# Altium PCB PCB2.PcbDoc
Units mil, origin at the board's own origin, x right, y up, seen from the top; angles counter-clockwise.
Board outline 6000 x 4000 mil, 2 copper layers (Top Layer, Bottom Layer); 28 components, 48 nets, 152 pads, 0 vias.
Unrouted connection lines stored in the file: 2.
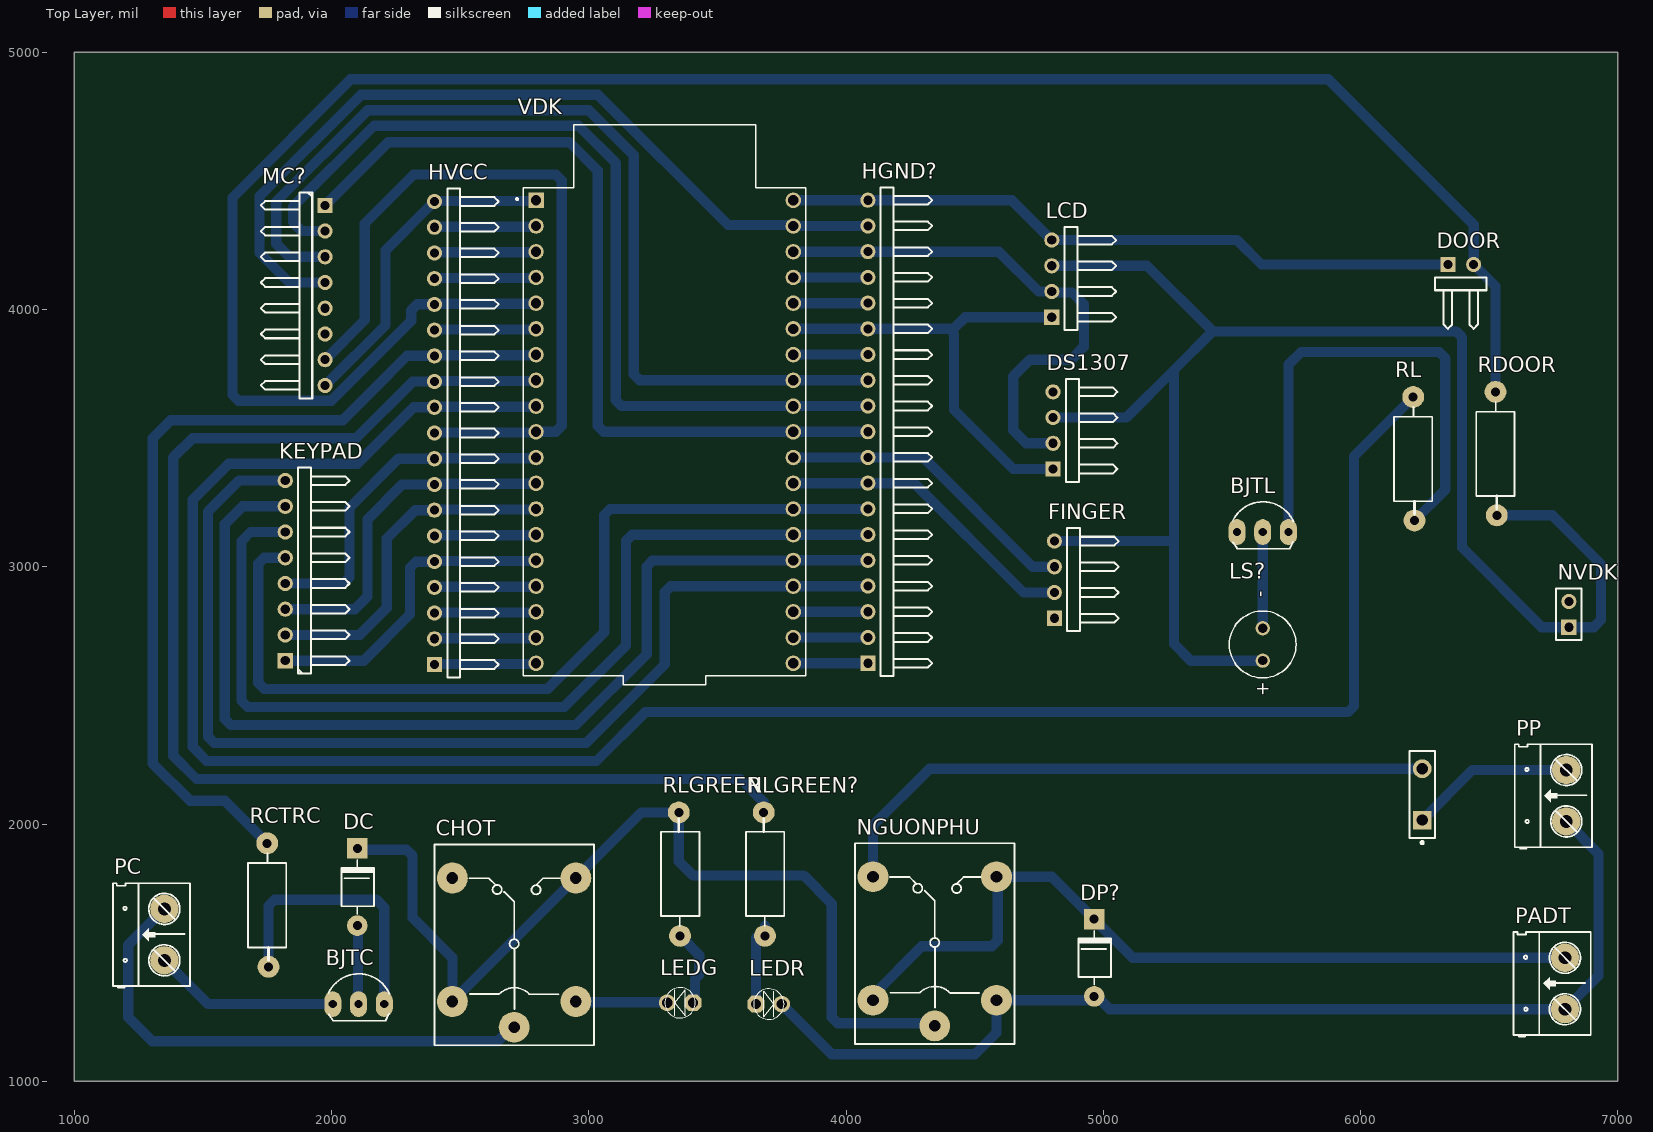
[diagram p0: Top Layer view]
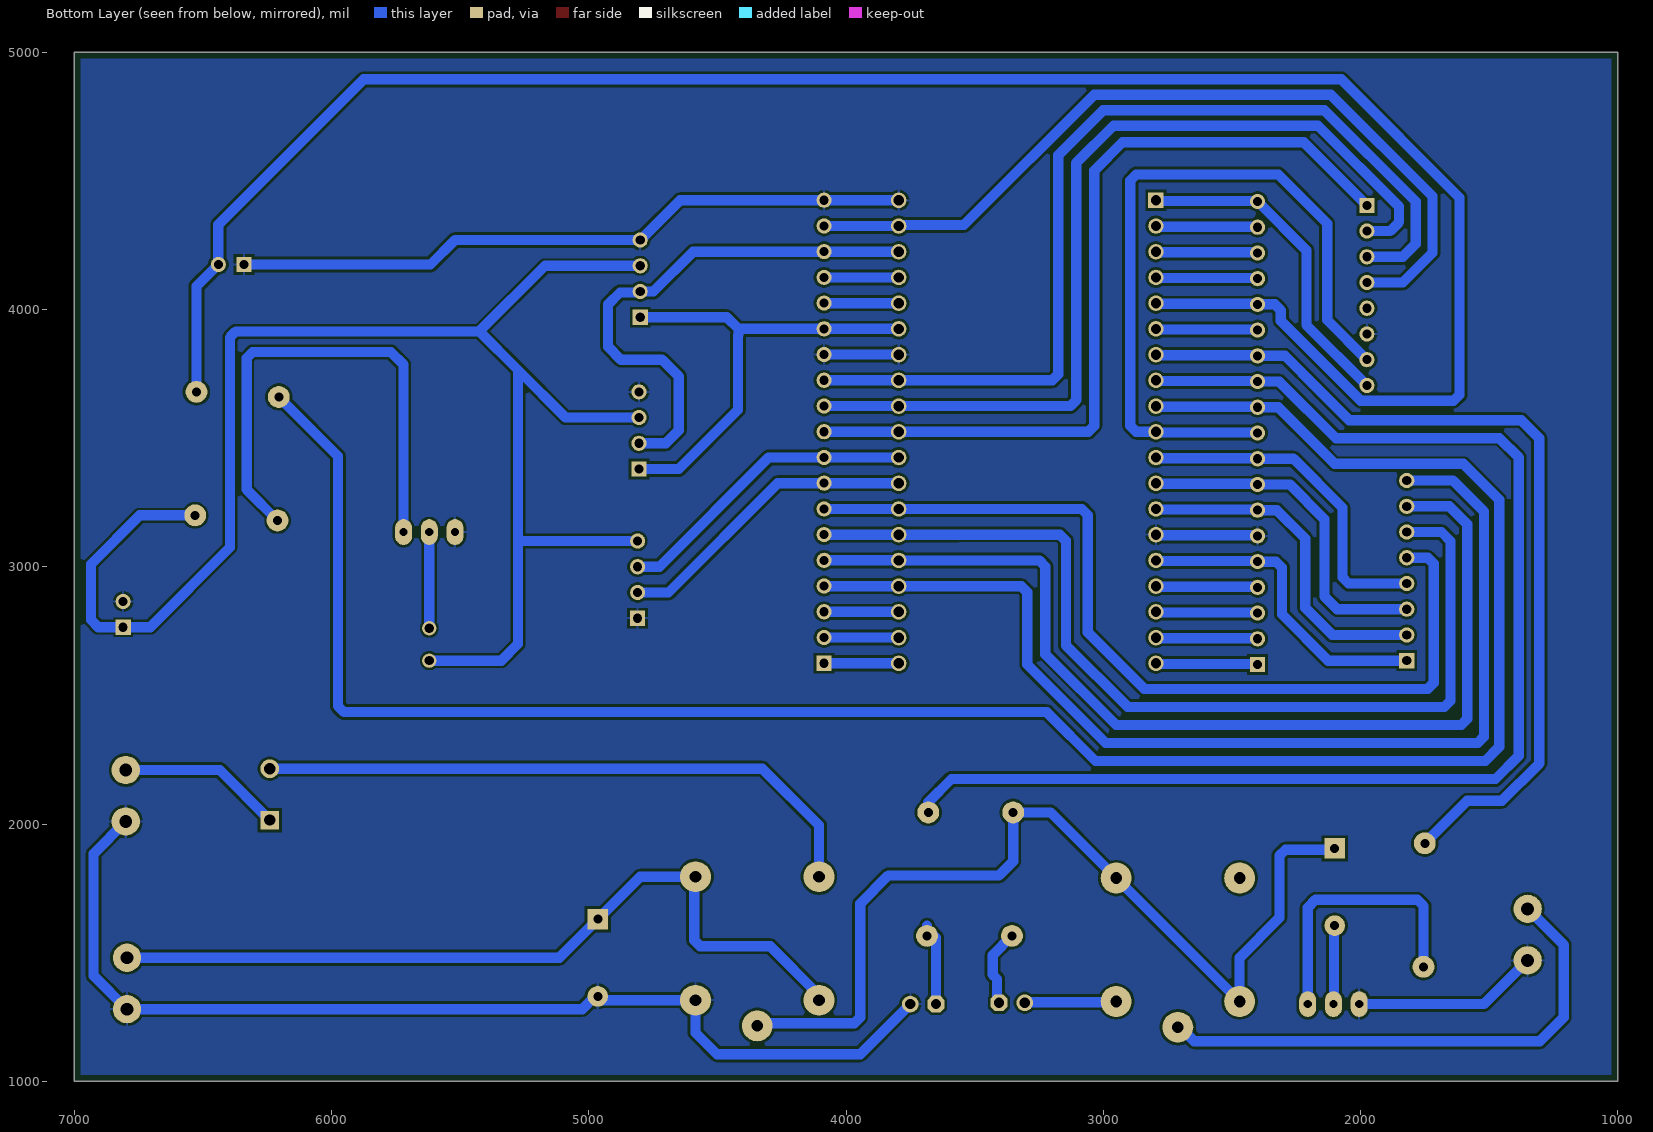
[diagram p1: Bottom Layer view, seen from below]
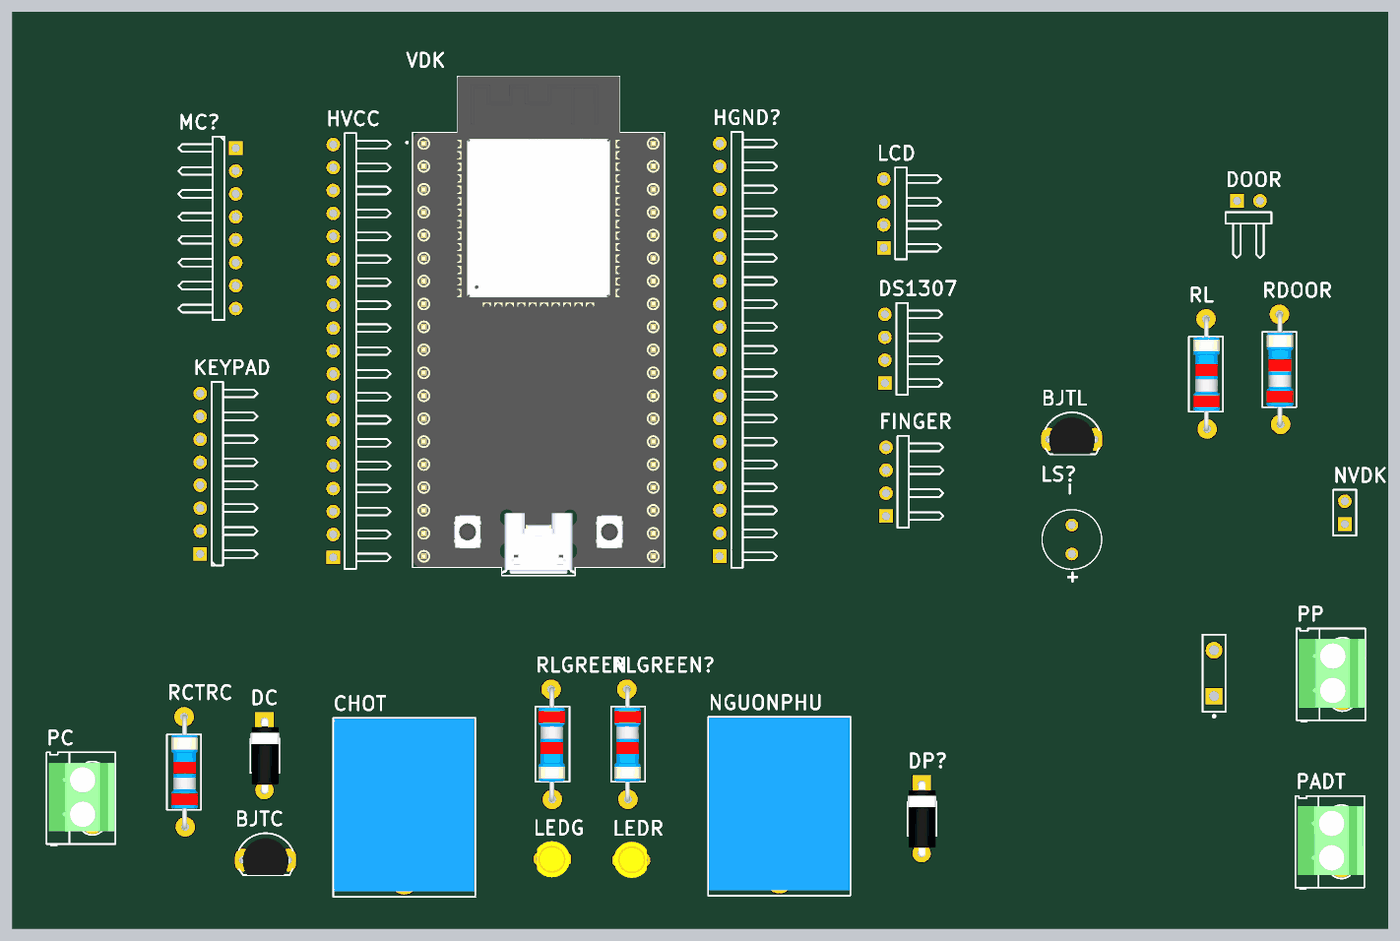
[diagram p2: 3D render of the assembled board from above, using the file's embedded part models]

## Layer stack, top to bottom
Top Solder: solder mask 0.4, Solder Resist, Dk 3.5
Top Layer: signal copper 1.4
Dielectric 1: dielectric 12.6, FR-4, Dk 4.8
Bottom Layer: signal copper 1.4
Bottom Solder: solder mask 0.4, Solder Resist, Dk 3.5

## Board outline
1000,1000 7000,1000 7000,5000 1000,5000

## Design rules (kind name [scope] priority, off if disabled: settings)
Clearance [All] p1: gap=10 ignorepadtopadclearanceinfootprint=FALSE except(0: Arc-Hole Track-Hole SMDPad-Hole THPad-Hole Via-Hole Fill-Hole Poly-Hole Region-Hole Text-Hole)
PolygonConnect [All] p1: connectstyle=Relief reliefconductorwidth=10 reliefentries=4 polygonreliefangle="90 Angle" airgapwidth=10
RoutingVias [All] p1: holewidth=28 width=50 viastyle="Through Hole" minholewidth=28 minwidth=50 maxholewidth=28 maxwidth=50
SolderMaskExpansion [All] p1: expansion=4 istentingtop=FALSE
Width [All] p1: maxlimit=100 minlimit=10 preferedwidth=40 toplayer_maxwidth=10 toplayer_prefwidth=10 minimp=50.000000 maximp=50.000000 favimp=50.000000
30 further rules are at their usual default settings.

## Classes and differential pairs
component class Sheet1: BJTC BJTL CHOT DC DOOR DP? DS1307 FINGER HGND? HVCC KEYPAD LCD LEDG LEDR LS? MC? NGUONPHU NVDK PADT PC PP RCTRC RDOOR RL RLGREEN RLGREEN?

## Components (designator, comment, footprint, x,y, rotation, side; value= is the part's Value field where it differs from the comment)
BJTC "C1815" TO92 2105,1300 r0 top value=C9014
BJTL "C1815" TO92 5620,3135 r0 top value=C9014
CHOT "Relay 10A/12V" "RELAY 5" 2710,1535 r90 top value="Relay SPDT, 10A, 12V"
DC "100v" "DIODE 1A" 2100,1555 r270 top
DOOR "Header 2H" HDR1X2H 6340,4175 r0 top
DP? "100v" "DIODE 1A" 4965,1280 r270 top
DS1307 "Header 4H" HDR1X4H 4805,3380 r90 top
FINGER "Header 4H" HDR1X4H 4810,2800 r90 top
HGND? "Header 19H" HDR1X19H 4085,2625 r90 top
HVCC "Header 19H" HDR1X19H 2400,2620 r90 top
KEYPAD "Header 8H" HDR1X8H 1820,2635 r90 top
LCD "Header 4H" HDR1X4H 4800,3970 r90 top
LEDG "LED" LED-3MM-YELLOW 3405,1305 r180 top value="LED 3 ly Single Colour"
LEDR "LED" LED-3MM-YELLOW 3650,1300 r0 top value="LED 3 ly Single Colour"
LS? "CMT-6635C-030" CUI_CMT-6635C-030 5620,2697.99 r90 top
MC? "Header 8H" HDR1X8H 1975,4405 r270 top
NGUONPHU "Relay 10A/12V" "RELAY 5" 4345,1540 r90 top value="Relay SPDT, 10A, 12V"
NVDK "Header 2" HDR1X2 6810,2765 r90 top
PADT "CON 2 KF301" "Con 2 KF301 5.08" 6795,1280 r90 top
PC "CON 2 KF301" "Con 2 KF301 5.08" 1350,1470 r90 top
PP "CON 2 KF301" "Con 2 KF301 5.08" 6800,2010 r90 top
RCTRC "Res" RES-1/2W 1750,1665 r90 top
RDOOR "Res" RES-1/2W 6525,3420 r90 top
RL "Res" RES-1/2W 6205,3400 r90 top
RLGREEN "Res" RES-1/2W 3355,1825 r270 top
RLGREEN? "Res" RES-1/2W 3685,1825 r270 top
VDK "ESP32-DEVKITC" MODULE_ESP32-DEVKITC 3295,3525 r0 top
? "SW-SPST" SPST-2 6240,2115 r90 top

## Footprints (in the part's own frame and the unit in brackets; to place one, negate y for a bottom-side part, rotate by r counter-clockwise, add the part's x,y. Pads: shape width x height; smd on the part's side, far side on the other; paste and mask are expansions set on the pad)
"Con 2 KF301 5.08" [mil]
  round 110 hole 50: 1(0,0) 2(200,0)
  silkscreen extent -106,-100 300,200, body extent -45,-97 255,190, height 335
CUI_CMT-6635C-030 [mm]
  round 1.408 hole 0.9: N(1.6,0) P(-1.6,0)
  silkscreen extent -3.3,-3.3 3.3,3.3
"DIODE 1A" [mil] "Diode 1A"
  round 80 hole 35: 1(-50,0)
  rect 80x80 hole 35: 2(-350,0)
  silkscreen extent -305,-61 -95,65, body extent -366,-61 -34,65, height 122
HDR1X2 [mm] "Connector; Header; 2 Position"
  rect 1.5x1.5 hole 0.9: 1(0,0)
  round 1.5 hole 0.9: 2(2.54,0)
  silkscreen extent -1.27,-1.27 3.81,1.27
HDR1X2H [mm] "Connector; Header; 2 Position; Right Angle"
  rect 1.5x1.5 hole 0.9: 1(0,0)
  round 1.5 hole 0.9: 2(2.54,0)
  silkscreen extent -1.27,-6.35 3.81,-1.27
HDR1X4H [mm] "Connector; Header; 4 Position; Right Angle"
  rect 1.5x1.5 hole 0.9: 1(0,0)
  round 1.5 hole 0.9: 2(2.54,0) 3(5.08,0) 4(7.62,0)
  silkscreen extent -1.27,-6.35 8.89,-1.27
HDR1X8H [mm] "Connector; Header; 8 Position; Right Angle"
  rect 1.5x1.5 hole 0.9: 1(0,0)
  round 1.5 hole 0.9: 2(2.54,0) 3(5.08,0) 4(7.62,0) 5(10.16,0) 6(12.7,0) 7(15.24,0) 8(17.78,0)
  silkscreen extent -1.27,-6.35 19.05,-1.27
HDR1X19H [mm] "Connector; Header; 19 Position; Right Angle"
  rect 1.5x1.5 hole 0.9: 1(0,0)
  round 1.5 hole 0.9: 2(2.54,0) 3(5.08,0) 4(7.62,0) 5(10.16,0) 6(12.7,0) 7(15.24,0) 8(17.78,0) 9(20.32,0) 10(22.86,0) 11(25.4,0) 12(27.94,0) 13(30.48,0) 14(33.02,0) 15(35.56,0) 16(38.1,0) 17(40.64,0) 18(43.18,0) 19(45.72,0)
  silkscreen extent -1.27,-6.35 46.99,-1.27
LED-3MM-YELLOW [mil]
  oct 65x65 hole 40: 1(0,0)
  round 65 hole 40: 2(100,0)
  silkscreen extent -9,-59 109,59, body extent -27,-77 117,80, height 181
MODULE_ESP32-DEVKITC [mm]
  rect 1.53x1.53 / inner round 1.53 / far side rect 1.53x1.53 hole 1.02: 1(-12.7,22.85)
  round 1.53 hole 1.02: 2(-12.7,20.31) 3(-12.7,17.77) 4(-12.7,15.23) 5(-12.7,12.69) 6(-12.7,10.15) 7(-12.7,7.61) 8(-12.7,5.07) 9(-12.7,2.53) 10(-12.7,-0.01) 11(-12.7,-2.55) 12(-12.7,-5.09) 13(-12.7,-7.63) 14(-12.7,-10.17) 15(-12.7,-12.71) 16(-12.7,-15.25) 17(-12.7,-17.79) 18(-12.7,-20.33) 19(-12.7,-22.87) 20(12.7,-22.87) 21(12.7,-20.33) 22(12.7,-17.79) 23(12.7,-15.25) 24(12.7,-12.71) 25(12.7,-10.17) 26(12.7,-7.63) 27(12.7,-5.09) 28(12.7,-2.55) 29(12.7,-0.01) 30(12.7,2.53) 31(12.7,5.07) 32(12.7,7.61) 33(12.7,10.15) 34(12.7,12.69) 35(12.7,15.23) 36(12.7,17.77) 37(12.7,20.31) 38(12.7,22.85)
  silkscreen extent -14.67,-25 13.95,30.3, body extent -13.97,-24.8 13.97,30.3, height 3.25
"RELAY 5" [mil] "Reley DPDT, 8 pin, 1A, W400mil, L800mil,H 300mil"
  round 120 hole 45: 1(-325,0) 2(255,240) 3(255,-240) 4(-225,-240) 5(-225,240)
  silkscreen extent -395,-310 385,310, body extent -371,-304 381,306, height 602
RES-1/2W [mil]
  round 85 hole 35: 1(-220,-5) 2(260,0)
  silkscreen extent -195,-74 221,75, body extent -230,-60 270,56, height 121
SPST-2 [mm] "Switch; 2 Leads"
  rect 1.85x1.85 hole 1.1: 1(-2.54,0)
  round 1.85 hole 1.1: 2(2.54,0)
  silkscreen extent -4.89,-1.27 4.28,1.27
TO92 [mil] "TO-92"
  oval 66x100 hole 32: 1(-100,0) 2(0,0) 3(100,0)
  silkscreen extent -117,-65 120,118, body extent -109,-66 109,95, height 245

## Part data
BJTC BJTL: "NPN transistor"
CHOT NGUONPHU: library part "Relay 5", "Relay SPDT,10A - 12VDC 5 Pin"
DC DP?: library part "Diode 1N4007", "Cắm", Chung_Loai=Cắm, Don_Vi=Con, Ma_Hang=MH001063, Ten_Linh_Kien="Diode 1N4007 1A (DIP)"
DOOR: "Header, 2-Pin, Right Angle", LatestRevisionDate=17-Jul-2002, LatestRevisionNote="Re-released for DXP Platform.", Publisher="Altium Limited"
DS1307 FINGER LCD: "Header, 4-Pin, Right Angle", LatestRevisionDate=17-Jul-2002, LatestRevisionNote="Re-released for DXP Platform.", Publisher="Altium Limited"
HGND? HVCC: "Header, 19-Pin, Right Angle", LatestRevisionDate=17-Jul-2002, LatestRevisionNote="Re-released for DXP Platform.", Publisher="Altium Limited"
KEYPAD MC?: "Header, 8-Pin, Right Angle", LatestRevisionDate=17-Jul-2002, LatestRevisionNote="Re-released for DXP Platform.", Publisher="Altium Limited"
LEDG LEDR: "LED Single colour Green and Red"
LS?: "6.6 mm, 3 Vo-p, 80 dB, Through Hole, Magnetic Audio Transducer Buzzer", Package="CUI Inc.", Availability=Unavailable, CUI_purchase_URL=https://www.cuidevices.com/product/audio/buzzers/audio-transducers/cmt-6635c-030?utm_source=snapeda.com&utm_medium=referral&utm_campaign=snapedaBOM, MF="CUI Devices", MP=CMT-6635C-030, Price=None, SnapEDA_Link=https://www.snapeda.com/parts/CMT-6635C-030/CUI%20Devices/view-part/2773120/?ref=snap
NVDK: "Header, 2-Pin", LatestRevisionDate=17-Jul-2002, LatestRevisionNote="Re-released for DXP Platform.", Publisher="Altium Limited"
PADT PC PP: "Cắm", Chung_Loai=Cắm, Don_Vi=Con, Ma_Hang=MH000987, Ten_Linh_Kien="CON 2 KF301-2P 5.08MM Xanh Dương"
RCTRC RDOOR RL RLGREEN RLGREEN?: Manufacturer="Generic Components", Class=Passive, Published=08/06/2000, Publisher="Altium Hobart Technology Centre", SubClass=R
VDK: "ESP32-WROOM-32UE series Transceiver; 802.11 b/g/n (Wi-Fi, WiFi, WLAN), Bluetooth Â® Smart Ready 4.x Dual Mode Evaluation Board", Package=None, Availability="In Stock", Check_prices=https://www.snapeda.com/parts/ESP32-DEVKITC/Espressif+Systems/view-part/?ref=eda, MF="Espressif Systems", MP=ESP32-DEVKITC, Price=None, Purchase-URL=https://pricing.snapeda.com/search/part/ESP32-DEVKITC/?ref=eda, SnapEDA_Link=https://www.snapeda.com/parts/ESP32-DEVKITC/Espressif+Systems/view-part/?ref=snap
?: "Single-Pole, Single-Throw Switch", LatestRevisionDate=17-Jul-2002, LatestRevisionNote="Re-released for DXP Platform.", PackageDescription="Switch; 2 Leads", PackageReference=SPST-2, Published=24-Mar-1999, Publisher="Altium Limited"

## Nets (pads, with @x,y where several pads share a name; then routed paths per layer and width w, separated by ;. In a path a pad name is that pad's centre, name@x,y a point inside that pad or via, vN(x,y) a via of type N, cw(c..) or ccw(c..) an arc to the next point about the centre after c; other vN are vias at no path point)
3V3: HVCC.19 MC?.8 VDK.1 | length 1287.9
  Bottom Layer w40: MC?.8 2210,3940 2210,4230 HVCC.19 2402.3,4422.3 2792.7,4422.3 VDK.1
12V_ADT: DP?.2 NGUONPHU.3 NGUONPHU.5 PADT.2 | length 3160.5
  Bottom Layer w40: NGUONPHU.5@4105,1335 4295,1525 4566.57,1525 4590,1548.43 NGUONPHU.3@4590,1795 ; NGUONPHU.3 NGUONPHU.3@4590,1795 ; PADT.2 5115,1480 DP?.2 4800,1795 NGUONPHU.3@4590,1795
BUZZER: HVCC.11 RL.2 VDK.9 | length 8369.1
  Bottom Layer w40: VDK.9 2792.7,3622.3 2402.3,3622.3 HVCC.11 2320,3620 2180,3480 2155,3455 2100,3400 1600,3400 1460,3260 1460,2300 1515,2245 3030,2245 3220,2435 5951.57,2435 5975,2458.43 5975,3430 RL.2
C0: HVCC.9 KEYPAD.4 VDK.11 | length 1336.9
  Bottom Layer w40: KEYPAD.4 2046.57,2935 2070,2958.43 2070,3230 2260,3420 HVCC.9 2402.3,3422.3 2792.7,3422.3 VDK.11
C1: HVCC.8 KEYPAD.3 VDK.12 | length 1353.5
  Bottom Layer w40: KEYPAD.3 2090,2835 2140,2885 2140,3185 2275,3320 HVCC.8 2402.3,3322.3 2792.7,3322.3 VDK.12
C2: HVCC.7 KEYPAD.2 VDK.13 | length 1336
  Bottom Layer w40: KEYPAD.2 2110,2735 2215,2840 2215,3110 2325,3220 HVCC.7 2402.3,3222.3 2792.7,3222.3 VDK.13
C3: HVCC.5 KEYPAD.1 VDK.15 | length 1242.7
  Bottom Layer w40: KEYPAD.1 2125,2635 2305,2815 2305,2996.57 2328.43,3020 HVCC.5 2402.3,3022.3 2792.7,3022.3 VDK.15
CLK: HGND?.11 MC?.2 VDK.30 | length 3556.9
  Bottom Layer w40: MC?.2 1885,4305 1850,4340 1850,4400 2165,4715 2960,4715 3105,4570 3105,3648.04 3128.43,3624.61 VDK.30 3795.2,3624.8 4084.8,3624.8 HGND?.11
COM12V: CHOT.3 CHOT.5 DC.2 NGUONPHU.1 RLGREEN.1 | length 3750.8
  Bottom Layer w40: DC.2 2105,1900 2291.57,1900 2315,1876.57 2315,1635 2470,1480 CHOT.5 CHOT.3 3205,2045 RLGREEN.1 3350,1855 3405,1800 3835,1800 3945,1690 3945,1248.43 3968.43,1225 4335,1225 NGUONPHU.1@4345,1235
CRX: HGND?.16 VDK.35 | length 290.2
  Bottom Layer w40: VDK.35 3795.2,4124.8 4084.8,4124.8 HGND?.16
CTRL_C: HVCC.13 RCTRC.2 VDK.7 | length 3462.9
  Bottom Layer w40: RCTRC.2 1585,2090 1450,2090 1305,2235 1305,3500 1375,3570 2043.58,3570 2164.29,3690.71 2164.29,3690.86 2293.43,3820 HVCC.13 2402.3,3822.3 2792.7,3822.3 VDK.7
CTX: HGND?.15 VDK.34 | length 290.2
  Bottom Layer w40: VDK.34 3795.2,4024.8 4084.8,4024.8 HGND?.15
DOOR: DOOR.2 HVCC.15 RDOOR.2 VDK.5 | length 8071.5
  Bottom Layer w40: VDK.5 2792.7,4022.3 2402.3,4022.3 HVCC.15 2333.43,4020 2310,3996.57 2310,3955.82 1999.66,3645.47 1638.43,3645.47 1615,3668.9 1615,4435 2075,4895 5875,4895 6440,4330 DOOR.2 6525,4090 RDOOR.2
GND: BJTC.1 BJTL.1 DOOR.1 DP?.1 DS1307.4 FINGER.1 HGND?.13 HGND?.19 HVCC.6 LCD.4 LEDR.2 MC?.6 NGUONPHU.4 NVDK.2 PADT.1 PC.1 PP.1 VDK.14 VDK.32 VDK.38 | length 8178.6
  Bottom Layer w40: PC.1 1520,1300 BJTC.1 ; HVCC.6 2402.3,3122.3 2792.7,3122.3 VDK.14 ; LEDR.2 3945,1105 4501.57,1105 4585,1188.43 NGUONPHU.4 DP?.1@4939.18,1315 ; VDK.32 3795.2,3824.8 4084.8,3824.8 HGND?.13 ; VDK.38 3795.2,4424.8 4084.8,4424.8 HGND?.19 4645,4425 LCD.4 5520.31,4270 5615.31,4175 DOOR.1 ; DP?.1 4975.82,1330 5025.82,1280 PADT.1 6925,1410 6925,1885 PP.1
LEDR: HVCC.12 RLGREEN?.1 VDK.8 | length 5063.7
  Bottom Layer w40: VDK.8 2792.7,3722.3 2402.3,3722.3 HVCC.12 2315,3720 2095,3500 1460,3500 1385,3425 1385,2265 1475,2175 3590,2175 RLGREEN?.1@3680,2085
MISO: HGND?.12 MC?.3 VDK.31 | length 3757.1
  Bottom Layer w40: MC?.3 1835,4205 1785,4255 1785,4420 2140,4775 3000,4775 3175,4600 3175,3748.04 3198.43,3724.61 VDK.31 3795.2,3724.8 4084.8,3724.8 HGND?.12
MOSI: HGND?.18 MC?.4 VDK.37 | length 3262.8
  Bottom Layer w40: MC?.4 1835,4105 1720,4220 1720,4440 2115,4835 3035,4835 3541.52,4328.48 3791.13,4328.48 VDK.37 3795.2,4324.8 4084.8,4324.8 HGND?.18
Net_1: ?.1 PP.2 | length 640.8
  Bottom Layer w40: ?.1 6435,2210 PP.2
NetBJTC_2: BJTC.2 CHOT.4 DC.1 LEDG.2 | length 681.1
  Bottom Layer w40: DC.1 2102.5,1602.5 2102.5,1302.5 BJTC.2 BJTC.2@2105,1317 ; CHOT.4 2952.5,1307.5 3302.5,1307.5 LEDG.2
NetBJTC_3: BJTC.3 RCTRC.1 | length 1083.7
  Bottom Layer w40: RCTRC.1 1755,1681.57 1778.43,1705 2175,1705 2205,1675 BJTC.3
NetBJTL_2: BJTL.2 LS?.N | length 374
  Bottom Layer w40: LS?.N BJTL.2
NetBJTL_3: BJTL.3 RL.1 | length 1971.7
  Bottom Layer w40: BJTL.3 5720,3785 5770,3835 6306.57,3835 6330,3811.57 6330,3300 RL.1
NetHGND?_1: HGND?.1 VDK.20 | length 290.2
  Bottom Layer w40: VDK.20 3795.2,2624.8 4084.8,2624.8 HGND?.1
NetHGND?_2: HGND?.2 VDK.21 | length 290.2
  Bottom Layer w40: VDK.21 3795.2,2724.8 4084.8,2724.8 HGND?.2
NetHGND?_3: HGND?.3 VDK.22 | length 290.2
  Bottom Layer w40: VDK.22 3795.2,2824.8 4084.8,2824.8 HGND?.3
NetHVCC_2: HVCC.2 VDK.18 | length 396.9
  Bottom Layer w40: HVCC.2 2402.3,2722.3 2792.7,2722.3 VDK.18
NetHVCC_3: HVCC.3 VDK.17 | length 396.9
  Bottom Layer w40: HVCC.3 2402.3,2822.3 2792.7,2822.3 VDK.17
NetHVCC_4: HVCC.4 VDK.16 | length 396.9
  Bottom Layer w40: HVCC.4 2402.3,2922.3 2792.7,2922.3 VDK.16
NetHVCC_14: HVCC.14 VDK.6 | length 396.9
  Bottom Layer w40: HVCC.14 2402.3,3922.3 2792.7,3922.3 VDK.6
NetHVCC_16: HVCC.16 VDK.4 | length 396.9
  Bottom Layer w40: HVCC.16 2402.3,4122.3 2792.7,4122.3 VDK.4
NetHVCC_17: HVCC.17 VDK.3 | length 396.9
  Bottom Layer w40: HVCC.17 2402.3,4222.3 2792.7,4222.3 VDK.3
NetHVCC_18: HVCC.18 VDK.2 | length 396.9
  Bottom Layer w40: HVCC.18 2402.3,4322.3 2792.7,4322.3 VDK.2
NetLEDG_1: LEDG.1 RLGREEN.2 | length 301.4
  Bottom Layer w40: RLGREEN.2 3430,1490 3430,1414.53 3412.97,1397.5 3412.97,1312.97 LEDG.1
NetLEDR_1: LEDR.1 RLGREEN?.2 | length 319.5
  Bottom Layer w40: LEDR.1 3650,1557.82 3685,1592.82 RLGREEN?.2@3685,1605
P+: ?.2 NGUONPHU.2 | length 2406.1
  Bottom Layer w40: NGUONPHU.2@4105,1815 4105,1995 4325,2215 ?.2
PC: CHOT.1 PC.2 | length 2041
  Bottom Layer w40: PC.2 1210,1530 1210,1248.43 1303.43,1155 2646.57,1155 2701.57,1210 CHOT.1
R0: HGND?.4 KEYPAD.8 VDK.23 | length 4218.4
  Bottom Layer w40: KEYPAD.8 1640,3335 1520,3215 1520,2338.43 1543.43,2315 2990,2315 3295,2620 3295,2901.17 3318.43,2924.61 VDK.23 3795.2,2924.8 4084.8,2924.8 HGND?.4
R1: HGND?.5 KEYPAD.7 VDK.24 | length 3995.2
  Bottom Layer w40: KEYPAD.7 1655,3235 1585,3165 1585,2408.43 1608.43,2385 2950,2385 3225,2660 3225,3001.17 3248.43,3024.61 VDK.24 3795.2,3024.8 4084.8,3024.8 HGND?.5
R2: HGND?.6 KEYPAD.6 VDK.25 | length 3766.2
  Bottom Layer w40: KEYPAD.6 1685,3135 1650,3100 1650,2478.43 1673.43,2455 2905,2455 3145,2695 3145,3101.17 3168.43,3124.61 3561.67,3124.61 VDK.25 3795.2,3124.8 4084.8,3124.8 HGND?.6
R3: HGND?.7 KEYPAD.5 VDK.26 | length 3514.7
  Bottom Layer w40: KEYPAD.5 1738.43,3035 1715,3011.57 1715,2548.43 1738.43,2525 2840,2525 3060,2745 3060,3201.17 3083.43,3224.61 VDK.26 3795.2,3224.8 4084.8,3224.8 HGND?.7
RQ: MC?.5
RSTSPI: HVCC.10 MC?.7 VDK.10 | length 2907.8
  Bottom Layer w40: MC?.7 2129.32,3959.32 2129.32,4334.32 2320,4525 2871.57,4525 2895,4501.57 2895,3548.04 2871.57,3524.61 VDK.10 2792.7,3522.3 2402.3,3522.3 HVCC.10
RX2: FINGER.2 HGND?.8 VDK.27 | length 1191.2
  Bottom Layer w40: VDK.27 3795.2,3324.8 4084.8,3324.8 HGND?.8 4265,3325 4690,2900 FINGER.2
SCL: DS1307.2 HGND?.17 LCD.2 VDK.36 | length 2088.4
  Bottom Layer w40: VDK.36 3795.2,4224.8 4084.8,4224.8 HGND?.17 4593.59,4225 4748.59,4070 LCD.2 4803.65,4066.35 4878.65,4066.35 4925,4020 4925,3855 4875,3805 4715,3805 4650,3740 4650,3530 4700,3480 DS1307.2
SDA: DS1307.1 HGND?.14 LCD.1 VDK.33 | length 1820
  Bottom Layer w40: VDK.33 3795.2,3924.8 4084.8,3924.8 HGND?.14 4417.81,3925 ; LCD.1 4462.81,3970 4417.81,3925 ; DS1307.1 4650,3380 4420,3610 4420,3900 4417.81,3902.19 4417.81,3925
SS: HGND?.10 MC?.1 VDK.29 | length 3258.9
  Bottom Layer w40: MC?.1 2220,4650 2925,4650 3035,4540 3035,3548.04 3058.43,3524.61 VDK.29 3795.2,3524.8 4084.8,3524.8 HGND?.10
TX2: FINGER.3 HGND?.9 VDK.28 | length 1191.2
  Bottom Layer w40: VDK.28 3795.2,3424.8 4084.8,3424.8 HGND?.9 4300,3425 4725,3000 FINGER.3
VCC: DS1307.3 FINGER.4 HVCC.1 LCD.3 LS?.P NVDK.1 RDOOR.1 VDK.19 | length 6951.5
  Bottom Layer w40: HVCC.1 2402.3,2622.3 2792.7,2622.3 VDK.19 ; LCD.3 5170,4170 5425,3915 ; DS1307.3 5090,3580 5275,3765 ; FINGER.4 5261.57,3100 ; LS?.P 5340,2635 5275,2700 5275,3100 5275,3765 ; RDOOR.1 6745,3200 6935,3010 6935,2793.43 6906.57,2765 NVDK.1 6705,2765 6395,3075 6395,3891.57 6371.57,3915 5425,3915 ; 5275,3765 5425,3915
pads on no net: CHOT.2

## Polygon pours and split planes (outlines as drawn)
GND on Bottom Layer "GND_L02_P000" (solid, pour order 0): 6975,4975 6975,1025 1025,1025 1025,4975

## Text inside footprints (layer, text, board x,y; h text height)
LS?: Top Overlay "+" at 5642.52,2496.49 h50.18 r90; Top Overlay "-" at 5631.11,2880.68 h50.14 r90